# Altium PCB PowerConverter.PcbDoc
Units mm, origin at the board's own origin, x right, y up, seen from the top; angles counter-clockwise.
Board outline 26 x 10.5 mm, 2 copper layers (Top Layer, Bottom Layer); 5 components, 3 nets, 17 pads, 5 vias.
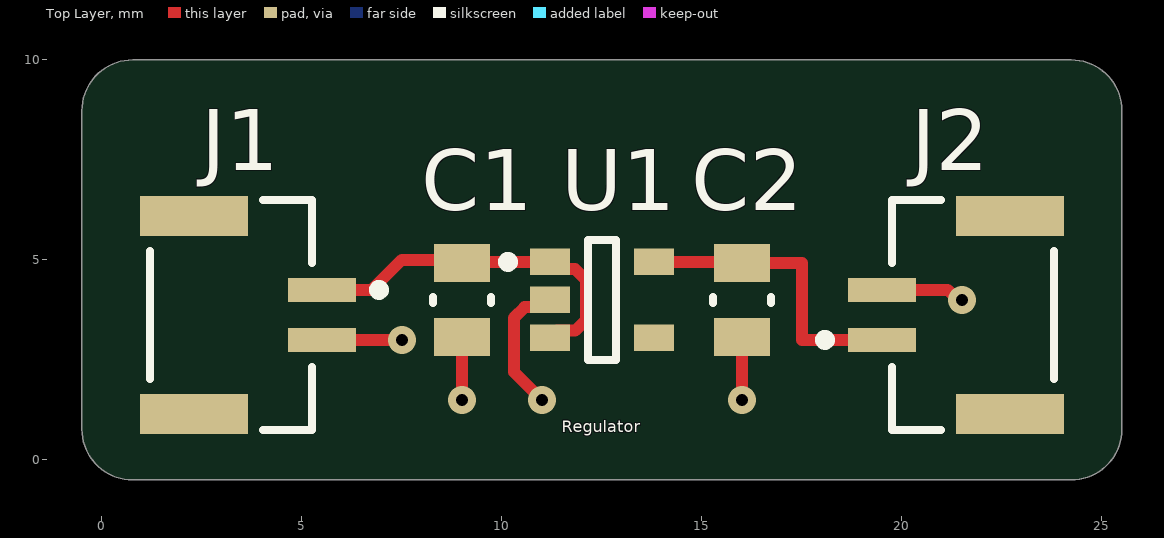
[diagram p0: Top Layer view]
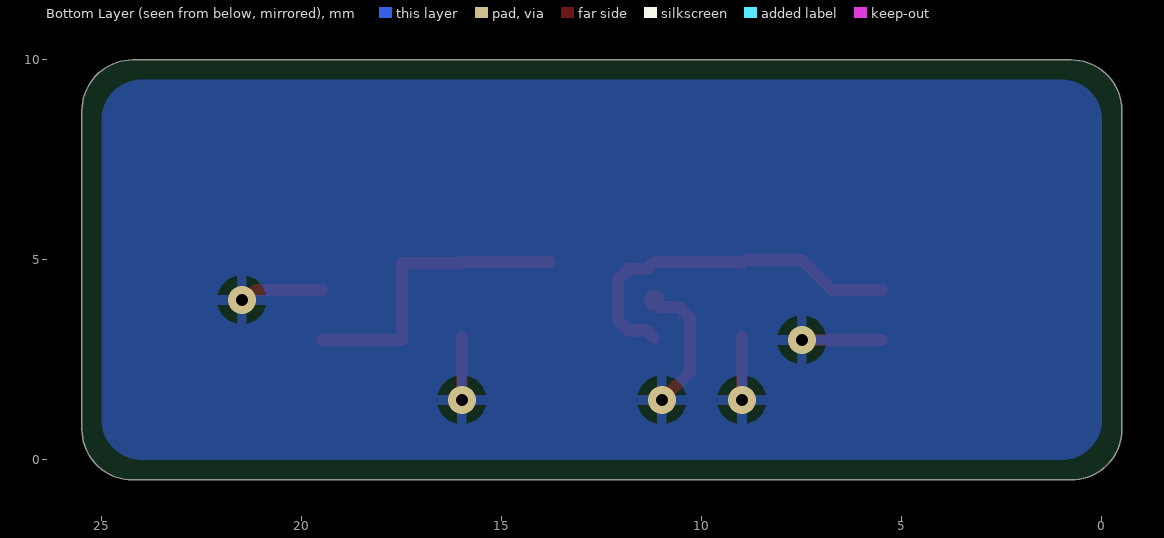
[diagram p1: Bottom Layer view, seen from below]
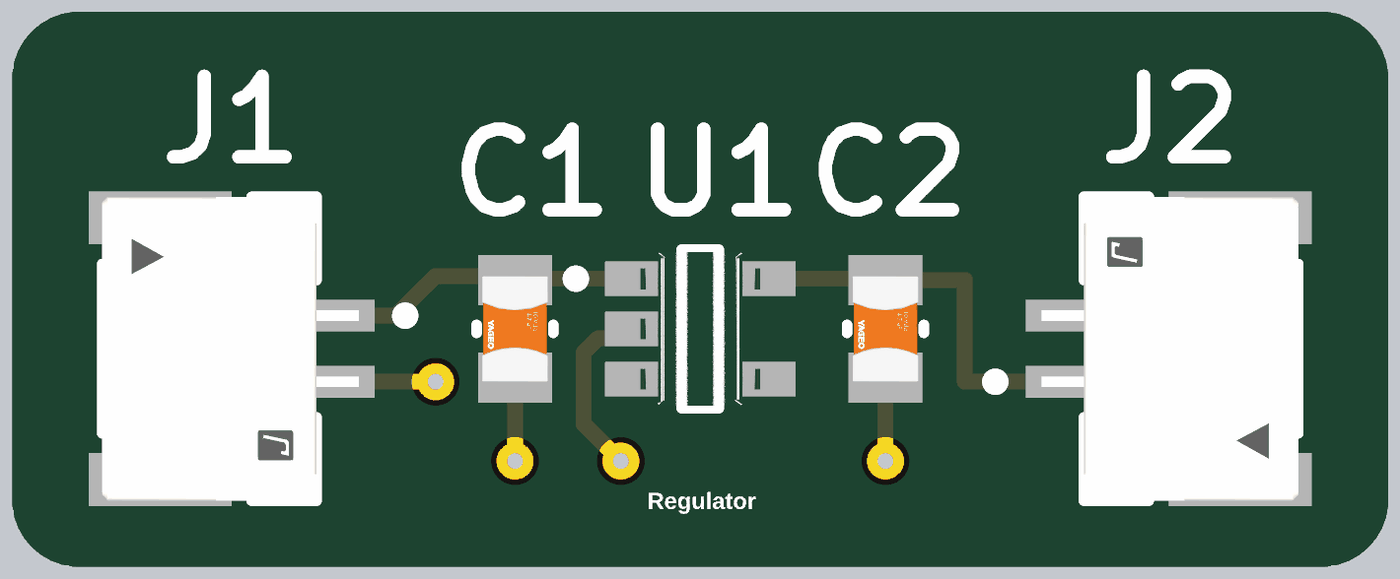
[diagram p2: 3D render of the assembled board from above, using the file's embedded part models]

## Layer stack, top to bottom
Top Solder: solder mask 0.0102, Solder Resist, Dk 3.5
Top Layer: signal copper 0.0356
Dielectric 1: dielectric 0.32, FR-4, Dk 4.8
Bottom Layer: signal copper 0.0356
Bottom Solder: solder mask 0.0102, Solder Resist, Dk 3.5

## Board outline
-0.5,0.77 -0.5,8.73 cw(c0.77,8.73) 0.77,10 24.23,10 cw(c24.23,8.73) 25.5,8.73 25.5,0.77 cw(c24.23,0.77) 24.23,-0.5 0.77,-0.5 cw(c0.77,0.77)

## Design rules (kind name [scope] priority, off if disabled: settings)
Clearance [All] p1: gap=0.254 ignorepadtopadclearanceinfootprint=FALSE except(0: Arc-Hole Track-Hole SMDPad-Hole THPad-Hole Via-Hole Fill-Hole Poly-Hole Region-Hole Text-Hole)
PolygonConnect [All] p1: connectstyle=Relief reliefconductorwidth=0.254 reliefentries=4 polygonreliefangle="90 Angle" airgapwidth=0.254
RoutingVias [All] p1: holewidth=0.711 width=1.27 viastyle="Through Hole" minholewidth=0.711 minwidth=1.27 maxholewidth=0.711 maxwidth=1.27
SolderMaskExpansion [All] p1: expansion=0.102 istentingtop=FALSE
SupplyNets "Schematic Supply Nets_2" [InNet('+3V3')] p1: voltage=0.000
SupplyNets "Schematic Supply Nets_1" [InNet('+5V')] p2: voltage=0.000
SupplyNets "Schematic Supply Nets" [InNet('GND')] p3: voltage=0.000
Width [All] p1: maxlimit=0.5 minlimit=0.254 preferedwidth=0.3
30 further rules are at their usual default settings.

## Components (designator, comment, footprint, x,y, rotation, side; value= is the part's Value field where it differs from the comment)
C1 "1uF" FP-CC0805-0_85-MFG 9,4 r270 top value="1 uF"
C2 "1uF" FP-CC0805-0_85-MFG 16,4 r270 top value="1 uF"
J1 "SM02B-GHS-TB(LF)(SN)" FP-SM02B-GHS-TB_LF_SN-MFG 3.225,3.625 r270 top
J2 "SM02B-GHS-TB(LF)(SN)" FP-SM02B-GHS-TB_LF_SN-MFG 21.775,3.625 r90 top
U1 "MIC5317-3.3YM5-TR" FP-SOT23-5LD-PL-1-MFG 12.5,4 r0 top

## Footprints (in the part's own frame and the unit in brackets; to place one, negate y for a bottom-side part, rotate by r counter-clockwise, add the part's x,y. Pads: shape width x height; smd on the part's side, far side on the other; paste and mask are expansions set on the pad)
FP-CC0805-0_85-MFG [mm]
  rect 0.95x1.4 smd paste+0 mask+0: 1(-0.925,0) 2(0.925,0)
  silkscreen extent -0.08,-0.72 0.08,0.72, body extent -1.6,-1.05 1.6,1.05, height 0.25
FP-SM02B-GHS-TB_LF_SN-MFG [mm]
  rect 0.6x1.7 smd paste+0 mask+0: 1(-0.625,2.275) 2(0.625,2.275)
  rect 1x2.7 smd paste+0 mask+0: 3(-2.475,-0.925) 4(2.475,-0.925)
  silkscreen extent -2.88,-2.02 2.88,3.83, body extent -3.08,-2.37 3.08,3.22, height 0.25
FP-SOT23-5LD-PL-1-MFG [mm]
  rect 1x0.66 smd paste+0 mask+0: 1(-1.3,0.95) 2(-1.3,0) 3(-1.3,-0.95) 4(1.3,-0.95) 5(1.3,0.95)
  silkscreen extent -2.47,-1.5 0.35,1.5, body extent -1.9,-1.6 1.9,1.6, height 0.25

## Part data
C1 C2: library part CMP-03422-000182-1, "CAP CER 1UF 10V X7R 0805", Capacitance="1 uF", Manufacturer=Yageo, Manufacturer Part Number=CC0805KKX7R6BB105, Package=CC0805-0.85, Temperature="-30°C to +85°C", Temperature Characteristic=X7R, Temperature Range High=+85°C, Temperature Range Low=-30°C, Tolerance=0.1, Voltage Rating="10 V", Automotive=No, Category=Cap, ComponentLink2Description=Datasheet, ComponentLink2URL=http://www.yageo.com/documents/recent/UPY-GPHC_Y5V_6.3V-to-50V_8.pdf, Device Class L1="Passive Components", Device Class L2=Capacitors, Device Class L3="Ceramic Capacitors", Digikey Description="CAP CER 1UF 10V X7R 0805", Footprint Url=http://www.yageo.com/exep/pages/download/literatures/UPY-C_GEN_24.pdf, Height=0.95mm, Ipc Land Pattern Name=CAPC200125X85, Lead Free=Yes, Material=Ceramic, Mouser Description="Multilayer Ceramic Capacitors MLCC - SMD/SMT 1.0uF 10V X7R 10%", Octopart=https://octopart.com/cc0805kkx7r6bb105-yageo-42522859, RoHS=TRUE
J1 J2: library part CMP-2000-07076-2, "CONN HEADER SMD R/A 2POS 1.25MM", Color=Natural, Current Rating=1A, Package Quantity=2500, Voltage Rating=50V, Connector Type="Outer Shroud Contact", Contact Material=Bronze, Contact Plating=Tin, Contact Type="Male Pin", Fastening Type=Latch, Housing Color=Natural, Housing Material=Nylon, Lead Free="Lead Free", Mount="Surface Mount", Number of Contacts=2, Number of Positions=2, Number of Rows=1, Orientation="Right Angle", Packaging="Tape and Reel", Pitch=0.049inch, Series=GH, Termination=Solder
U1: library part CMP-06324-000116-1, "IC REG LINEAR 3.3V 150MA SOT23-5", Case/Package=SOT-23-5, Dropout Voltage=155mV, Max Input Voltage=6V, Max Operating Temperature=125°C, Min Current Limit=200mA, Min Input Voltage=2.5V, Min Operating Temperature=-40°C, Output Current=150mA, Output Voltage=3.3V, Package Quantity=3000, Power Supply Rejection Ratio (PSRR)=70dB, Mount="Surface Mount", Number of Outputs=1, Number of Regulators=1, Packaging="Tape and Reel", RoHS Compliant=No, Series=-

## Via types
v1: diameter 0.7, hole 0.3, Top Layer to Bottom Layer, 5 vias

## Nets (pads, with @x,y where several pads share a name; then routed paths per layer and width w, separated by ;. In a path a pad name is that pad's centre, name@x,y a point inside that pad or via, vN(x,y) a via of type N, cw(c..) or ccw(c..) an arc to the next point about the centre after c; other vN are vias at no path point)
+3V3: C2.1 J2.1 U1.5 | length 7.7
  Top Layer w0.3: U1.5 16,4.95 C2.1 17.5,4.925 17.5,3 J2.1
+5V: C1.1 J1.1 U1.1 U1.3 | length 9.2
  Top Layer w0.3: J1.1 6.75,4.25 7.5,5 8.925,5 C1.1 9.025,4.95 U1.1 11.38,4.77 11.831,4.77 12.104,4.497 12.104,3.503 11.831,3.23 11.38,3.23 U1.3
GND: C1.2 C2.2 J1.2 J2.2 U1.2 | length 10.7
  Top Layer w0.3: J1.2 v1(7.5,3) ; v1(9,1.5) C1.2 ; v1(11,1.5) 10.296,2.204 10.296,3.547 10.569,3.82 11.02,3.82 U1.2@11.174,3.974 ; v1(16,1.5) C2.2 ; J2.2 21.142,4.25 21.392,4 v1(21.5,4)
  Top Layer w0.5: U1.2@11.174,3.974 U1.2
pads on no net: J1.3 J1.4 J2.3 J2.4 U1.4

## Polygon pours and split planes (outlines as drawn)
GND on Bottom Layer "GND_L02_P000" (solid, pour order 0): 0,8.5 cw(c1,8.5) 1,9.5 24,9.5 cw(c24,8.5) 25,8.5 25,1 cw(c24,1) 24,0 1,0 cw(c1,1) 0,1

## Silkscreen, mask and mechanical layers (free items; w line width, h text height)
Top Overlay:
  text "Regulator" at 11.5,0.595 h0.5
Mechanical 1:
  the board outline again, w0.254